# Altium PCB PCB1.PcbDoc
Units mil, origin at the board's own origin, x right, y up, seen from the top; angles counter-clockwise.
Board outline 965 x 1560 mil, 2 copper layers (Top Layer, Bottom Layer); 14 components, 22 nets, 65 pads, 14 vias.
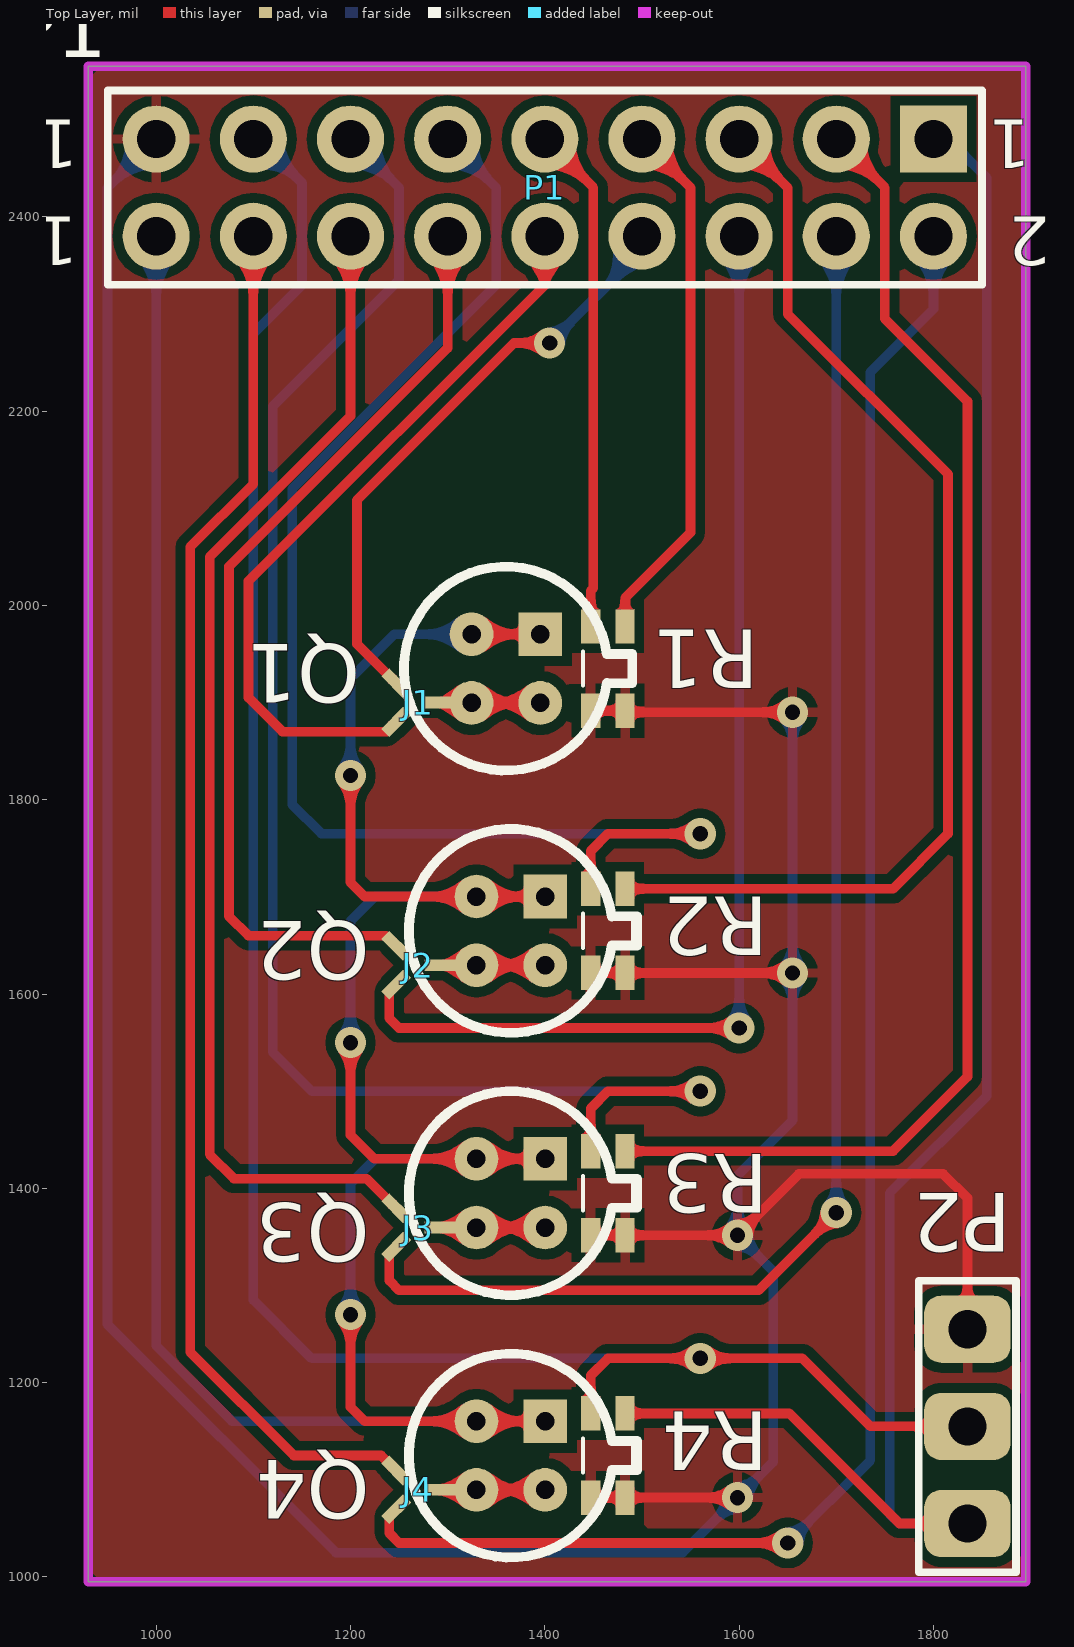
[diagram p0: Top Layer view]
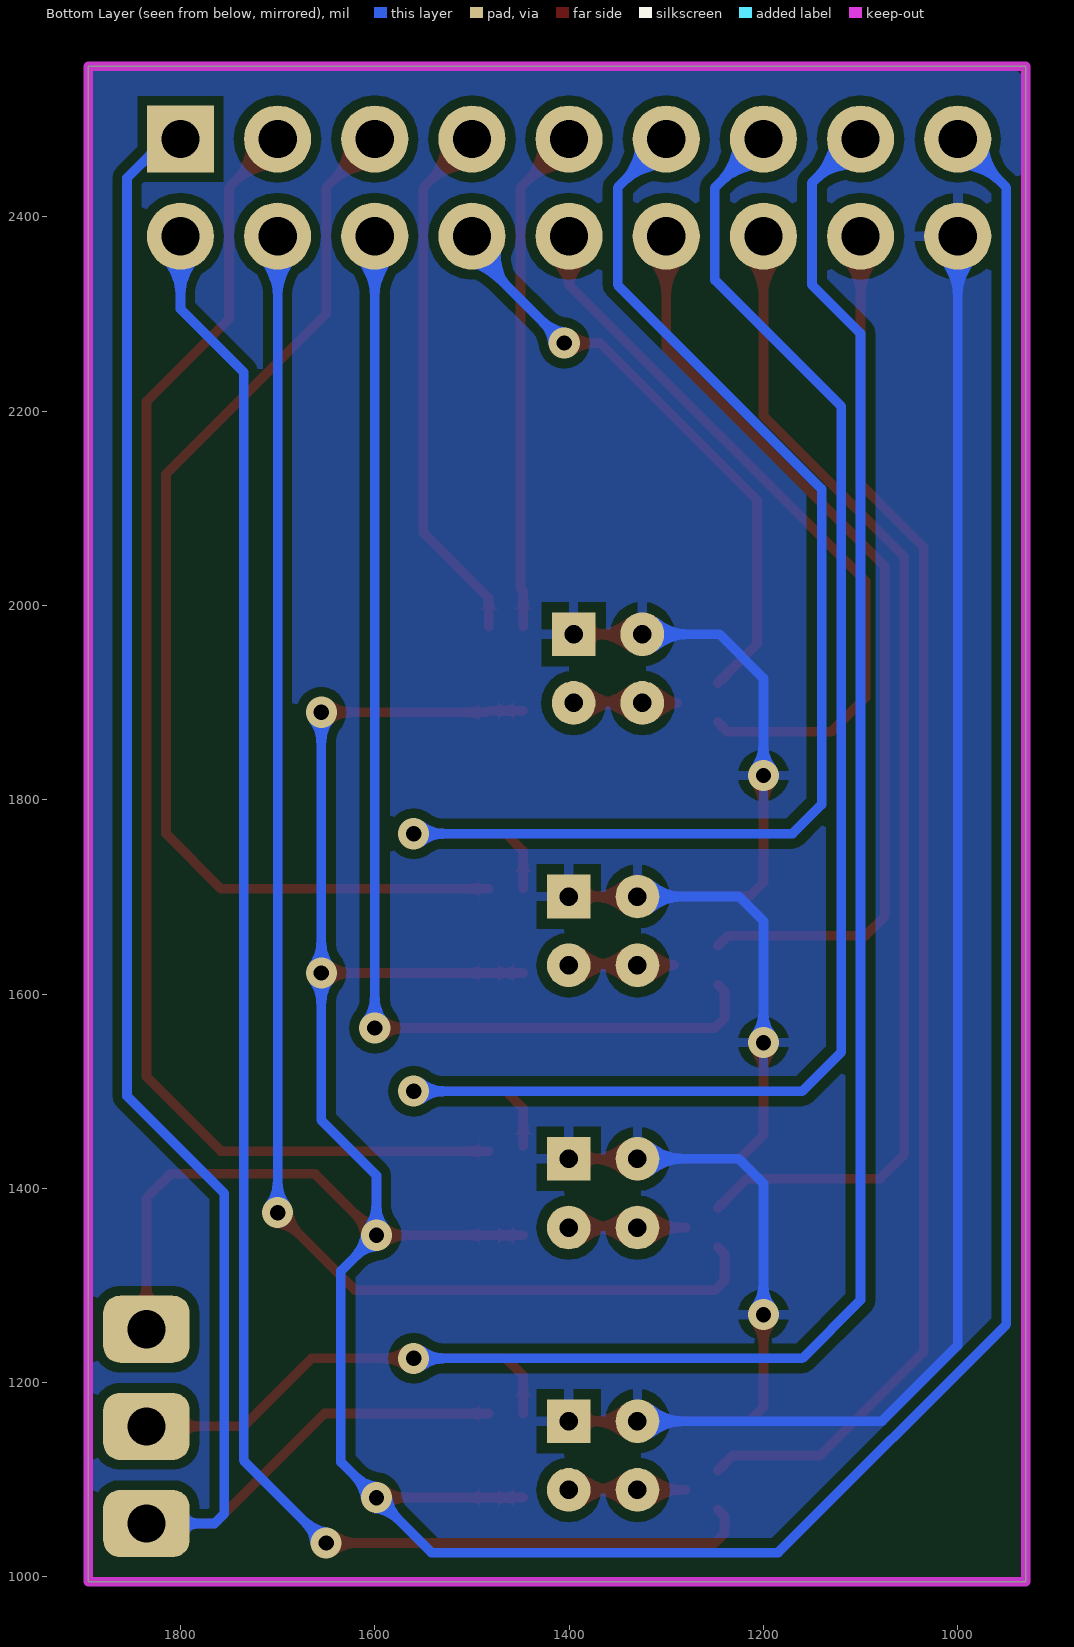
[diagram p1: Bottom Layer view, seen from below]
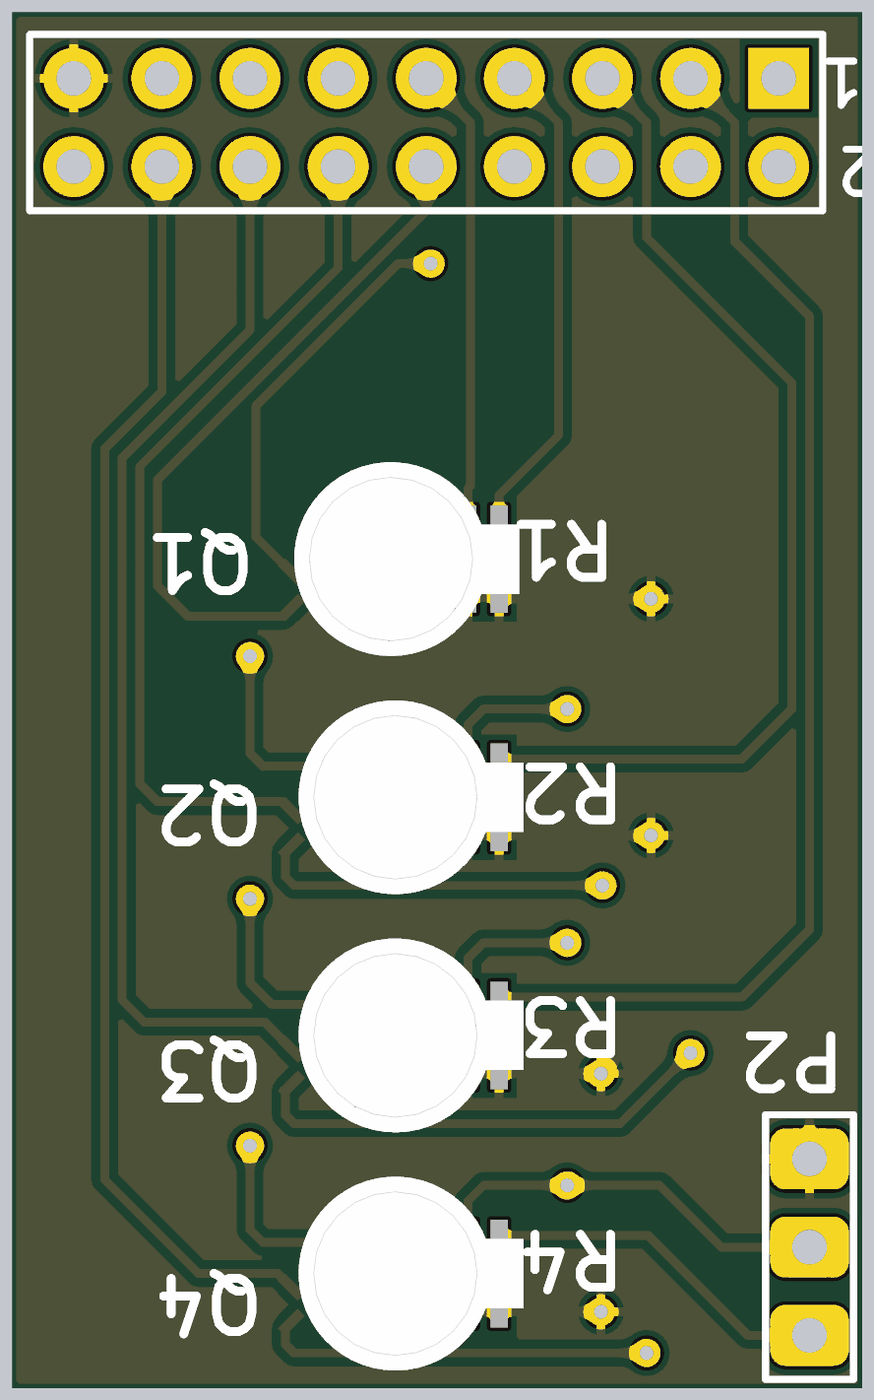
[diagram p2: 3D render of the assembled board from above, using the file's embedded part models]

## Layer stack, top to bottom
Top Solder: solder mask 0.4, Solder Resist, Dk 3.5
Top Layer: signal copper 1.4
Dielectric1: dielectric 12.6, FR-4, Dk 4.8
Bottom Layer: signal copper 1.4
Bottom Solder: solder mask 0.4, Solder Resist, Dk 3.5

## Board outline
930,995 930,2555 1895,2555 1895,995

## Design rules (kind name [scope] priority, off if disabled: settings)
Clearance [All] p1: gap=10
PolygonConnect [All] p1: connectstyle=Relief reliefconductorwidth=10 reliefentries=4 polygonreliefangle="90 Angle" airgapwidth=10
RoutingVias [All] p1: holewidth=28 width=50 viastyle="Through Hole" minholewidth=28 minwidth=50 maxholewidth=28 maxwidth=50
SolderMaskExpansion [All] p1: expansion=4
Width [All] p1: maxlimit=10 minlimit=10 preferedwidth=10
30 further rules are at their usual default settings.

## Components (designator, comment, footprint, x,y, rotation, side; value= is the part's Value field where it differs from the comment)
J1 "3 way net tie junction Y shape" 3wayY_LP#1 1265,1900 r180 top net-tie
J2 "3 way net tie junction Y shape" 3wayY_LP#2 1265,1629.65 r180 top net-tie
J3 "3 way net tie junction Y shape" 3wayY_LP#2 1265,1359.65 r180 top net-tie
J4 "3 way net tie junction Y shape" 3wayY_LP#2 1265,1089.65 r180 top net-tie
P1 "MOS board" HDR2X9 1800,2480 r180 top
P2 "Header 3" HDR1X3 1835,1055 r90 top locked
Q1 "3N163" TO-206AF 1360,1935 r270 top
Q2 "3N163" TO-206AF 1365,1665 r270 top
Q3 "3N163" TO-206AF 1365,1395 r270 top
Q4 "3N163" TO-206AF 1365,1125 r270 top
R1 "PT1000" SMD_Resistor-shunt_0805 1465,1935 r270 top
R2 "PT1000" SMD_Resistor-shunt_0805 1465,1665 r270 top
R3 "PT1000" SMD_Resistor-shunt_0805 1465,1395 r270 top
R4 "PT1000" SMD_Resistor-shunt_0805 1465,1125 r270 top

## Footprints (in the part's own frame and the unit in brackets; to place one, negate y for a bottom-side part, rotate by r counter-clockwise, add the part's x,y. Pads: shape width x height; smd on the part's side, far side on the other; paste and mask are expansions set on the pad)
3wayY_LP#1 [mil] "3 way low power net tie Y shape junction"
  rrect5% 32x12 smd paste-100: 1(-27,0)
  rrect5% 32x12 smd rot 135 paste-100: 2(18,-20)
  rrect5% 32x12 smd rot 45 paste-100: 3(18,20)
3wayY_LP#2 [mil] "3 way low power net tie Y shape junction"
  rrect5% 32x12 smd paste-100: 1(-27,0)
  rrect5% 32x12 smd rot 45 paste-100: 2(18,20)
  rrect5% 32x12 smd rot 135 paste-100: 3(18,-20)
HDR1X3 [mm] "Connector; Header; 3 Position"
  rrect50% 1.754x2.262 hole 1: 1(0,0) 2(2.54,0) 3(5.08,0)
  silkscreen extent -1.27,-1.27 6.35,1.27
HDR2X9 [mm] "Connector; Header; 9x2 Position"
  rect 1.754x1.754 hole 1: 1(0,0)
  round 1.754 hole 1: 2(0,2.54) 3(2.54,0) 4(2.54,2.54) 5(5.08,0) 6(5.08,2.54) 7(7.62,0) 8(7.62,2.54) 9(10.16,0) 10(10.16,2.54) 11(12.7,0) 12(12.7,2.54) 13(15.24,0) 14(15.24,2.54) 15(17.78,0) 16(17.78,2.54) 17(20.32,0) 18(20.32,2.54)
  silkscreen extent -1.27,-1.27 21.59,3.81
SMD_Resistor-shunt_0805 [mm] "SMD Shunt Resistor, Inch 0805, Metric 2012."
  rect 0.9x0.5 smd: 1(-1.1,0.45) 2(-1.1,-0.45) 3(1.1,-0.45) 4(1.1,0.45)
  silkscreen extent -0.45,-0.65 0.45,0.65, body extent -1,-0.62 1,0.63, height 0.5
TO-206AF [mil]
  rect 45x45 hole 19: 1(-35.36,35.36)
  round 45 hole 19: 2(-35.36,-35.36) 3(35.36,-35.36) 4(35.36,35.36)
  silkscreen extent -105,-105 105,130, body extent -106,-106 106,146, height 73

## Part data
J1 J2 J3 J4: library part 3wayY
P1: library part "Header 9X2", "Header, 9-Pin, Dual row"
P2: "Header, 3-Pin"
Q1 Q2 Q3 Q4: "P-MOS for military application"
R1 R2 R3 R4: "Platinum Thin-Film Chip Sensor"

## Via types
v1: diameter 32, hole 15.75, Top Layer to Bottom Layer, 14 vias

## Nets (pads, with @x,y where several pads share a name; then routed paths per layer and width w, separated by ;. In a path a pad name is that pad's centre, name@x,y a point inside that pad or via, vN(x,y) a via of type N, cw(c..) or ccw(c..) an arc to the next point about the centre after c; other vN are vias at no path point)
MOS_1_C: J1.3 P1.10 | length 772
  Top Layer w10: J1.3 1237,1870 1130,1870 1095,1905 1095,2025 1400,2330 P1.10
MOS_1_V: J1.2 P1.8 | length 619.7
  Top Layer w10: J1.2 1206.64,1960.36 1206.64,2108.36 1368.28,2270 v1(1405,2270)
  Bottom Layer w10: v1(1405,2270) 1500,2365 P1.8
MOS_2_C: J2.3 P1.12 | length 977.8
  Top Layer w10: J2.3 1236.65,1660 1095,1660 1075,1680 1075,2040 1300,2265 P1.12
MOS_2_V: J2.2 P1.6 | length 1216.7
  Top Layer w10: J2.2 1240,1602.65 1240,1575 1250,1565 v1(1600,1565)
  Bottom Layer w10: v1(1600,1565) P1.6
MOS_3_C: J3.3 P1.14 | length 1220
  Top Layer w10: P1.14 1200,2195 1055,2050 1055,1435 1080,1410 1216.65,1410 J3.3
MOS_3_V: J3.2 P1.4 | length 1539.8
  Top Layer w10: J3.2 1240,1332.65 1240,1305 1250,1295 1620,1295 v1(1700,1375)
  Bottom Layer w10: v1(1700,1375) P1.4
MOS_4_C: J4.3 P1.16 | length 1437.8
  Top Layer w10: P1.16 1100,2125 1035,2060 1035,1231.65 1141.65,1125 1231.65,1125 J4.3
MOS_4_V: J4.2 P1.2 | length 1848.8
  Top Layer w10: J4.2 1240,1062.65 1240,1045 1250,1035 v1(1650,1035)
  Bottom Layer w10: v1(1650,1035) 1735,1120 1735,2240 1800,2305 P1.2
MOS_RTN: P1.18 Q1.1 Q1.2 Q2.1 Q2.2 Q3.1 Q3.2 Q4.1 Q4.2 | length 3281.8
  Top Layer w10: v1(1200,1270) 1200,1175 1214.64,1160.36 Q4.2 Q4.1 ; v1(1200,1550) 1200,1455 1224.64,1430.36 Q3.2 Q3.1 ; v1(1200,1825) 1200,1715 1215,1700 1215.36,1700.36 Q2.2 Q2.1 ; Q1.2 Q1.1
  Bottom Layer w10: P1.18 1000,1238.28 1077.93,1160.36 Q4.2 ; v1(1200,1270) 1200,1405 1225.36,1430.36 Q3.2 ; v1(1200,1550) 1200,1675 1225.36,1700.36 Q2.2 ; v1(1200,1825) 1200,1925 1245.36,1970.36 Q1.2
NetJ1_1: J1.1 Q1.3 Q1.4 | length 106.4
  Top Layer w10: J1.1@1289,1899.65 Q1.3 Q1.4
NetJ2_1: J2.1 Q2.3 Q2.4 | length 108.4
  Top Layer w10: J2.1@1292,1629.81 Q2.3 Q2.4
NetJ3_1: J3.1 Q3.3 Q3.4 | length 120.4
  Top Layer w10: J3.1@1280,1359.65 Q3.3 Q3.4
NetJ4_1: J4.1 Q4.3 Q4.4 | length 120.4
  Top Layer w10: J4.1@1280,1089.65 Q4.3 Q4.4
PT1000_1_C: P1.1 P2.1 R4.1 | length 1971.3
  Top Layer w10: R4.1 1651.69,1168.31 1765,1055 P2.1
  Bottom Layer w10: P1.1 1815,2480 1855,2440 1855,1495 1755,1395 1755,1065 1765,1055 P2.1
PT1000_1_V: P1.15 P2.2 R4.2 | length 2187.2
  Top Layer w10: R4.2 1447.28,1207.28 1465,1225 v1(1560,1225) 1665,1225 1735,1155 P2.2
  Bottom Layer w10: P1.15 1105,2480 1150,2435 1150,2330 1100,2280 1100,1285 1160,1225 v1(1560,1225)
PT1000_2_C: P1.3 R3.1 | length 1405
  Top Layer w10: R3.1 1758.31,1438.31 1835,1515 1835,2210 1750,2295 1750,2430 P1.3
PT1000_2_V: P1.13 R3.2 | length 1630.2
  Top Layer w10: R3.2@1447.28,1443.31 1447.28,1482.28 1465,1500 v1(1560,1500)
  Bottom Layer w10: P1.13 1250,2430 1250,2335 1120,2205 1120,1540 1160,1500 v1(1560,1500)
PT1000_3_C: P1.5 R2.1 | length 1159.8
  Top Layer w10: R2.1 1758.31,1708.31 1815,1765 1815,2135 1650,2300 1650,2430 P1.5
PT1000_3_V: P1.11 R2.2 | length 1384.2
  Top Layer w10: R2.2 1447.28,1747.28 1465,1765 v1(1560,1765)
  Bottom Layer w10: P1.11 1350,2430 1350,2330 1140,2120 1140,1795 1170,1765 v1(1560,1765)
PT1000_4_C: P1.7 R1.1 | length 550.3
  Top Layer w10: R1.1 1482.72,2007.72 1550,2075 1550,2430 P1.7
PT1000_4_V: P1.9 R1.2 | length 523.5
  Top Layer w10: P1.9 1450,2430 1450,2017.72 1447.28,2015 R1.2
RTD_RTN: P1.17 P2.3 R1.3 R1.4 R2.3 R2.4 R3.3 R3.4 R4.3 R4.4 | length 3998.5
  Top Layer w10: R4.3 R4.4 v1(1598.31,1081.69) ; R3.3 R3.4 v1(1598.31,1351.69) 1661.62,1415 1810,1415 1835,1390 P2.3 ; R2.3 R2.4 v1(1655,1621.69) ; R1.3 R1.4 1484.41,1890 v1(1655,1890)
  Bottom Layer w10: P1.17 950,2430 950,1260 1185,1025 1541.62,1025 v1(1598.31,1081.69) 1635,1118.38 1635,1315 v1(1598.31,1351.69) 1598.31,1413.31 1655,1470 v1(1655,1621.69) v1(1655,1890)

## Polygon pours and split planes (outlines as drawn)
RTD_RTN on Top Layer "Top Layer-No Net" (solid, remove dead copper, pour order 2): 935,2550 1890,2550 1890,1000 935,1000
MOS_RTN on Bottom Layer "Top Layer-No Net" (solid, remove dead copper, pour order 4): 935,2550 1890,2550 1890,1000 935,1000

## Keep-outs
Keep-Out Layer:
  lines w10: 930,995 950,995 1895,995 1895,2555 930,2555 930,995

## Text inside footprints (layer, text, board x,y; h text height)
P1: Top Overlay "18" at 920,2400 h50 r180; Top Overlay "17" at 920,2500 h50 r180; Top Overlay "1" at 1900,2500 h50 r180; Top Overlay "2" at 1920,2400 h50 r180